# Altium PCB 混频器-拼板.PcbDoc
Units mil, origin at the board's own origin, x right, y up, seen from the top; angles counter-clockwise.
Board outline 6000 x 4000 mil, 2 copper layers (Top Layer, Bottom Layer); 30 components, 0 nets, 102 pads, 348 vias.
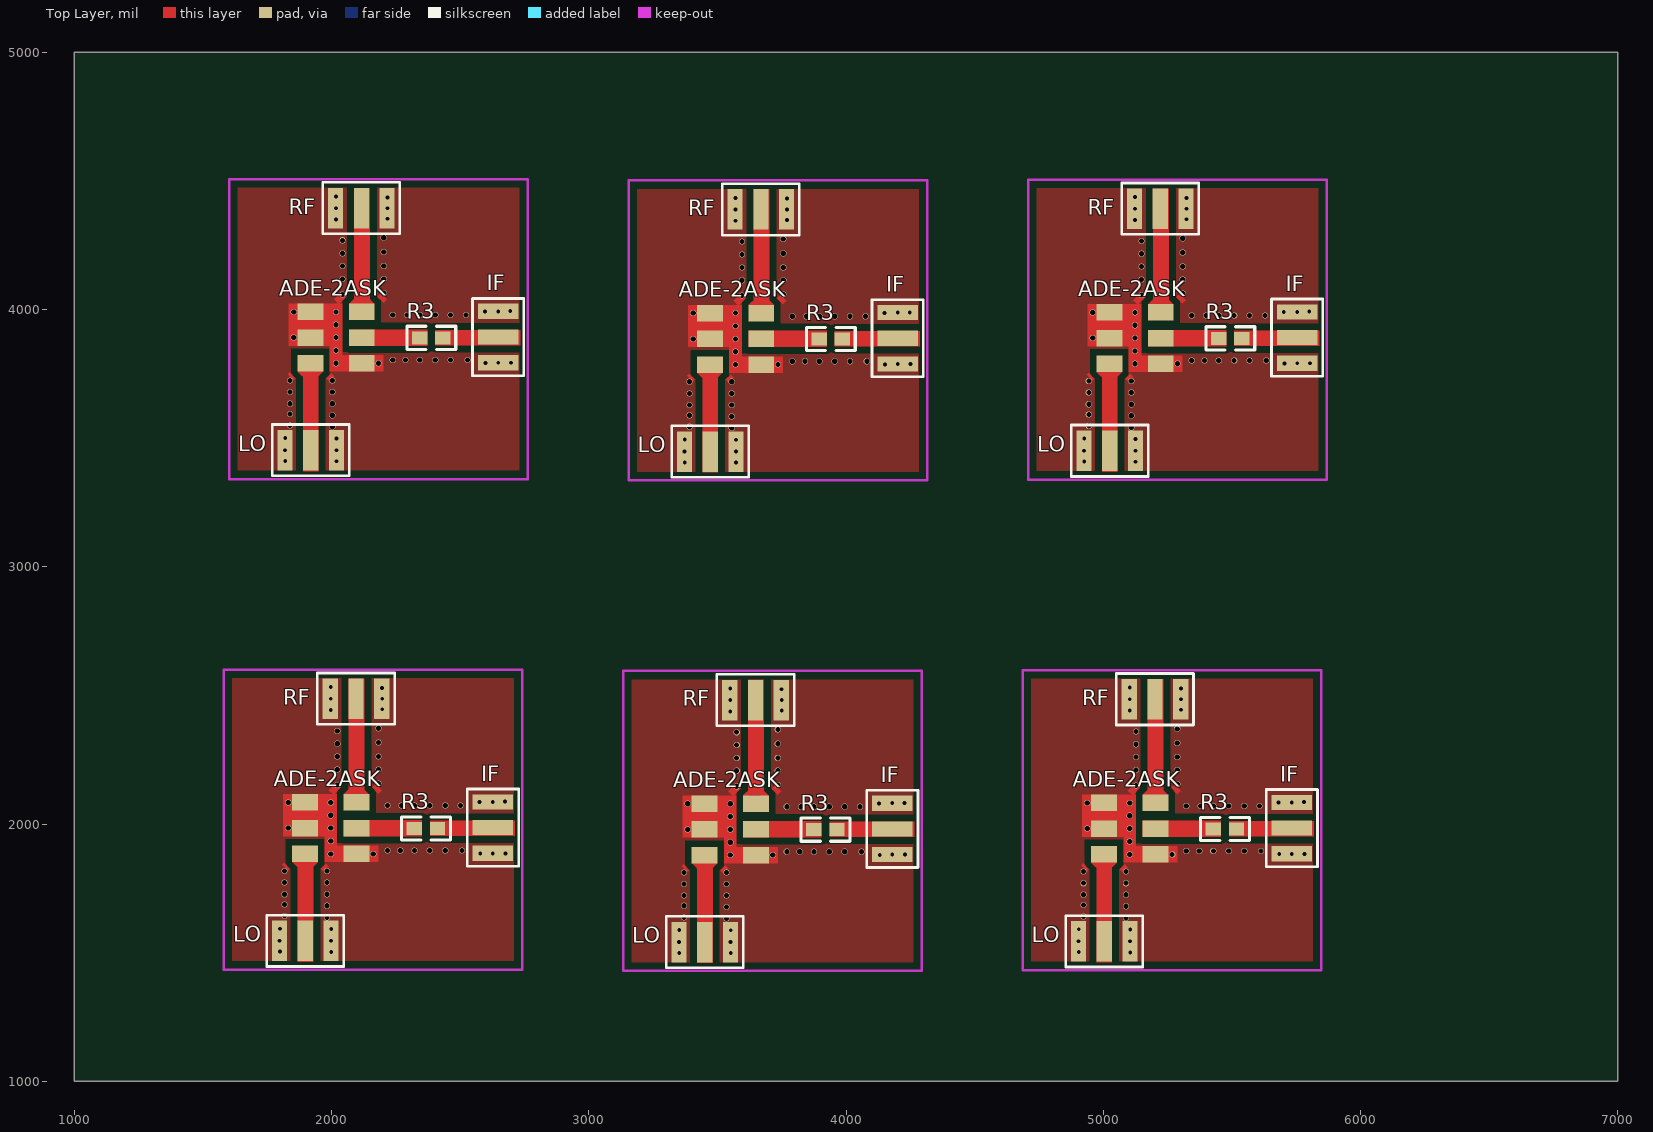
[diagram p0: Top Layer view]
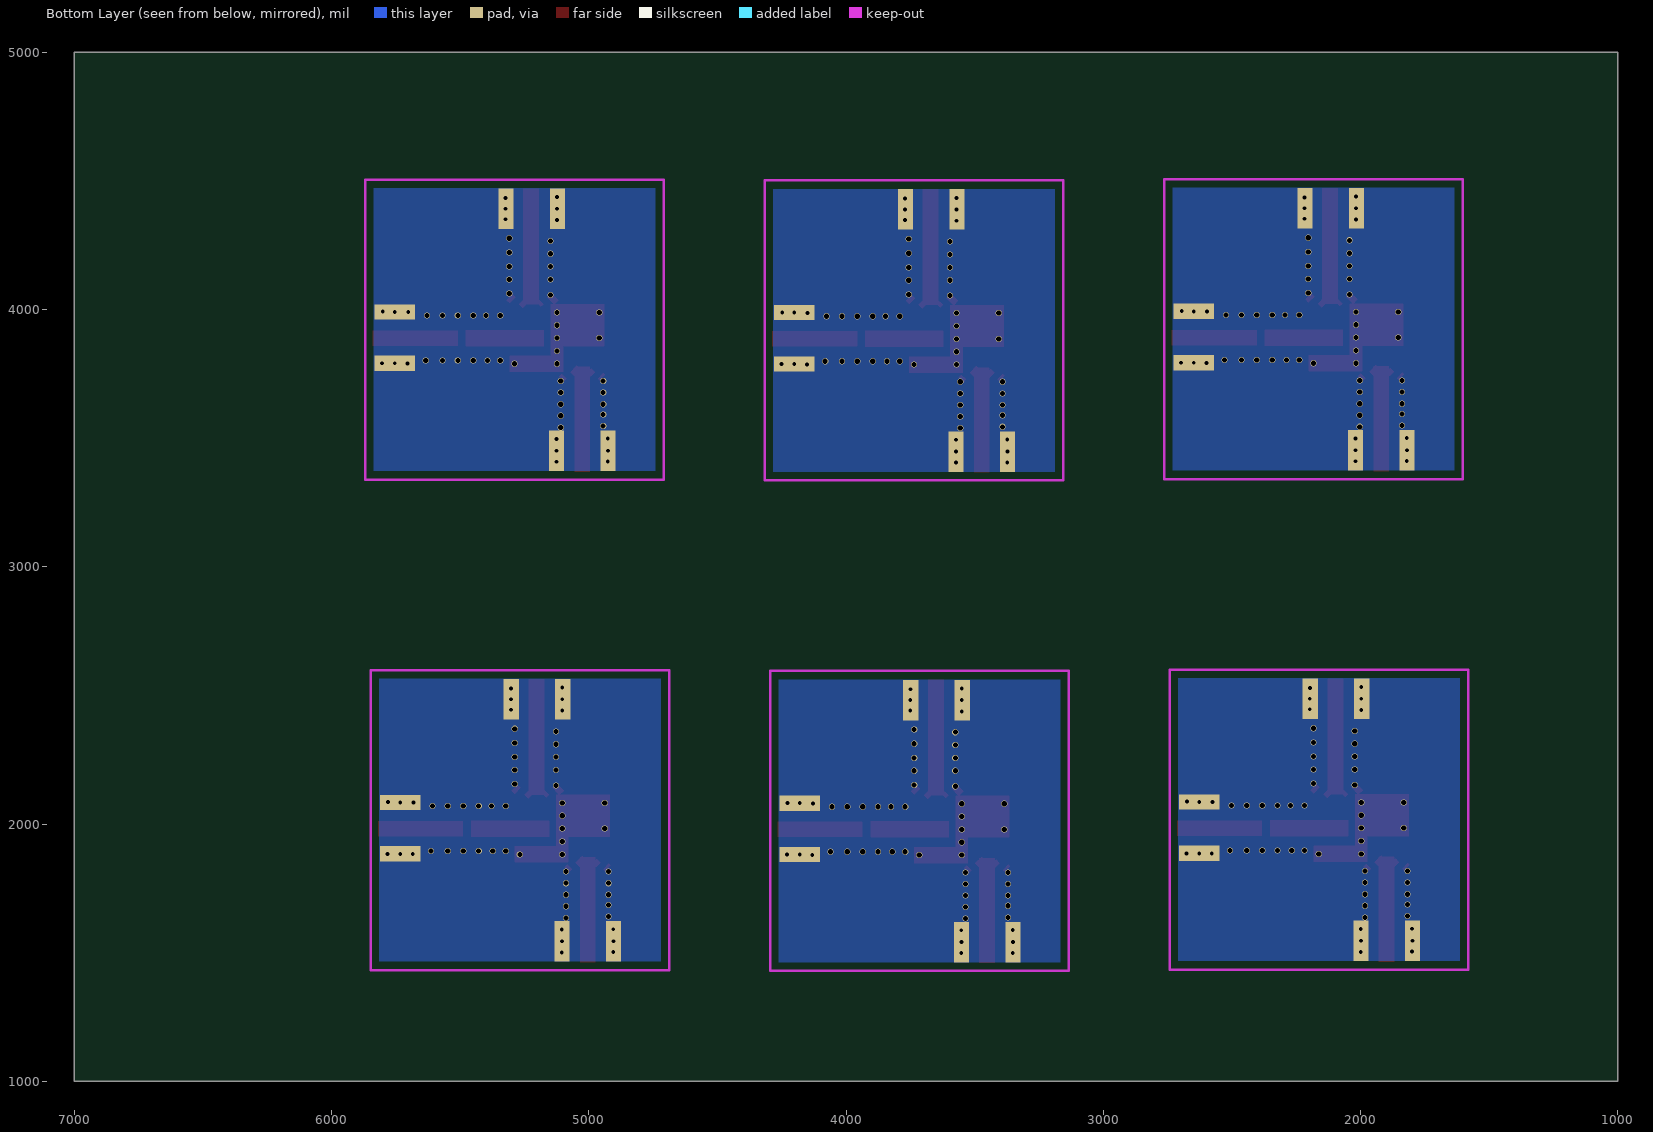
[diagram p1: Bottom Layer view, seen from below]

## Layer stack, top to bottom
Top Solder: solder mask 0.4, Solder Resist, Dk 3.5
Top Layer: signal copper 1.4
Dielectric 1: dielectric 12.6, FR-4, Dk 4.8
Bottom Layer: signal copper 1.4
Bottom Solder: solder mask 0.4, Solder Resist, Dk 3.5

## Board outline
1000,1000 7000,1000 7000,5000 1000,5000

## Design rules (kind name [scope] priority, off if disabled: settings)
Clearance [All] p1: gap=10
PolygonConnect [All] p1: connectstyle=Relief reliefconductorwidth=10 reliefentries=4 polygonreliefangle="90 Angle" airgapwidth=10
RoutingVias [All] p1: holewidth=28 width=50 viastyle="Through Hole" minholewidth=28 minwidth=50 maxholewidth=28 maxwidth=50
SolderMaskExpansion [All] p1: expansion=4
Width [All] p1: maxlimit=10 minlimit=10 preferedwidth=10
30 further rules are at their usual default settings.

## Components (designator, comment, footprint, x,y, rotation, side; value= is the part's Value field where it differs from the comment)
ADE-2ASK "4 HEADER" PL-052 5274,3757 r90 top
ADE-2ASK "4 HEADER" PL-052 5253,1850 r90 top
ADE-2ASK "4 HEADER" PL-052 3721,3754 r90 top
ADE-2ASK "4 HEADER" PL-052 3700,1847 r90 top
ADE-2ASK "4 HEADER" PL-052 2147,1852 r90 top
ADE-2ASK "4 HEADER" PL-052 2168,3759 r90 top
IF "SMA-2" SMA-2 5754,3891 r90 top
IF "SMA-2" SMA-2 5733,1984 r90 top
IF "SMA-2" SMA-2 4201,3888 r90 top
IF "SMA-2" SMA-2 4180,1981 r90 top
IF "SMA-2" SMA-2 2627,1986 r90 top
IF "SMA-2" SMA-2 2648,3893 r90 top
LO "SMA-2" SMA-2 5025,3451 r0 top
LO "SMA-2" SMA-2 5004,1544 r0 top
LO "SMA-2" SMA-2 3472,3448 r0 top
LO "SMA-2" SMA-2 3451,1541 r0 top
LO "SMA-2" SMA-2 1898,1546 r0 top
LO "SMA-2" SMA-2 1919,3453 r0 top
R3 "RES" 0805 5539,3888 r180 top
R3 "RES" 0805 5518,1981 r180 top
R3 "RES" 0805 3986,3885 r180 top
R3 "RES" 0805 3965,1978 r180 top
R3 "RES" 0805 2412,1983 r180 top
R3 "RES" 0805 2433,3890 r180 top
RF "SMA-2" SMA-2 5222,4392 r180 top
RF "SMA-2" SMA-2 5201,2485 r180 top
RF "SMA-2" SMA-2 3669,4389 r180 top
RF "SMA-2" SMA-2 3648,2482 r180 top
RF "SMA-2" SMA-2 2095,2487 r180 top
RF "SMA-2" SMA-2 2116,4394 r180 top

## Footprints (in the part's own frame and the unit in brackets; to place one, negate y for a bottom-side part, rotate by r counter-clockwise, add the part's x,y. Pads: shape width x height; smd on the part's side, far side on the other; paste and mask are expansions set on the pad)
0805 [mil]
  rect 60x50 smd: 1(0,0) 2(90,0)
  silkscreen extent -50,-45 140,45
PL-052 [mil]
  rect 64x100 smd: 1(32,50) 1(132,250) 1(232,250) 2(132,50) 3(232,50) 4(32,250)
  Top Layer region: 0,-35 64,-35 64,175 0,175
  Top Layer region: 0,125 264,125 264,175 0,175
  Top Layer region: 100,170 264,170 264,335 100,335
SMA-2 [mm]
  rect 1.5x4 smd: 1(0,0)
  rect 1.5x4 all layers, no hole: 2(2.54,0) 3(-2.54,0)
  silkscreen extent -3.81,-2.54 3.81,2.54, body extent -3,-11.89 3,1.71, height 3.2

## Part data
ADE-2ASK ADE-2ASK ADE-2ASK ADE-2ASK ADE-2ASK ADE-2ASK: "4 Pin Header"

## Via types
v1: diameter 24, hole 20, Top Layer to Bottom Layer, 240 vias
v2: diameter 30, hole 15, Top Layer to Bottom Layer, 108 vias

## Nets (pads, with @x,y where several pads share a name; then routed paths per layer and width w, separated by ;. In a path a pad name is that pad's centre, name@x,y a point inside that pad or via, vN(x,y) a via of type N, cw(c..) or ccw(c..) an arc to the next point about the centre after c; other vN are vias at no path point)
pads on no net: ADE-2ASK.1 ADE-2ASK.2 ADE-2ASK.3 ADE-2ASK.4 IF.1 IF.2 IF.3 LO.1 LO.2 LO.3 R3.1 R3.2 RF.1 RF.2 RF.3
copper on no net:
  other v1: 3535,1632 5088,1635 1982,1637 3370,1637 4923,1640 1817,1642 3535,1677 5088,1680 1982,1682 3370,1682 4923,1685 1817,1687 3370,1722 3535,1722 4923,1725 5088,1725 1817,1727 1982,1727 3370,1767 3535,1767 4923,1770 5088,1770 1817,1772 1982,1772 3370,1812 3535,1812 4923,1815 5088,1815 1817,1817 1982,1817 3550,1879 3715,1879 5103,1882 5268,1882 1997,1884 2162,1884 3770,1892 3820,1892 3875,1892 3935,1892 3995,1892 4060,1892 5323,1895 5373,1895 5428,1895 5488,1895 5548,1895 5613,1895 2217,1897 2267,1897 2322,1897 2382,1897 2442,1897 2507,1897 3550,1929 5103,1932 1997,1934 3385,1979 3550,1979 4938,1982 5103,1982 1832,1984 1997,1984 3550,2029 5103,2032 1997,2034 3770,2067 3825,2067 3875,2067 3935,2067 3995,2067 4055,2067 5323,2070 5378,2070 5428,2070 5488,2070 5548,2070 5608,2070 2217,2072 2272,2072 2322,2072 2382,2072 2442,2072 2502,2072 3385,2079 3550,2079 4938,2082 5103,2082 1832,2084 1997,2084 3575,2147 5128,2150 2022,2152 3735,2152 5288,2155 2182,2157 3575,2207 3735,2207 5128,2210 5288,2210 2022,2212 2182,2212 3575,2257 3735,2257 5128,2260 5288,2260 2022,2262 2182,2262 3575,2307 5128,2310 2022,2312 3735,2312 5288,2315 2182,2317 3575,2357 5128,2360 2022,2362 3735,2367 5288,2370 2182,2372 3556,3539 5109,3542 2003,3544 3391,3544 4944,3547 1838,3549 3556,3584 5109,3587 2003,3589 3391,3589 4944,3592 1838,3594 3391,3629 3556,3629 4944,3632 5109,3632 1838,3634 2003,3634 3391,3674 3556,3674 4944,3677 5109,3677 1838,3679 2003,3679 3391,3719 3556,3719 4944,3722 5109,3722 1838,3724 2003,3724 3571,3786 3736,3786 5124,3789 5289,3789 2018,3791 2183,3791 3791,3799 3841,3799 3896,3799 3956,3799 4016,3799 4081,3799 5344,3802 5394,3802 5449,3802 5509,3802 5569,3802 5634,3802 2238,3804 2288,3804 2343,3804 2403,3804 2463,3804 2528,3804 3571,3836 5124,3839 2018,3841 3406,3886 3571,3886 4959,3889 5124,3889 1853,3891 2018,3891 3571,3936 5124,3939 2018,3941 3791,3974 3846,3974 3896,3974 3956,3974 4016,3974 4076,3974 5344,3977 5399,3977 5449,3977 5509,3977 5569,3977 5629,3977 2238,3979 2293,3979 2343,3979 2403,3979 2463,3979 2523,3979 3406,3986 3571,3986 4959,3989 5124,3989 1853,3991 2018,3991 3596,4054 5149,4057 2043,4059 3756,4059 5309,4062 2203,4064 3596,4114 3756,4114 5149,4117 5309,4117 2043,4119 2203,4119 3596,4164 3756,4164 5149,4167 5309,4167 2043,4169 2203,4169 3596,4214 5149,4217 2043,4219 3756,4219 5309,4222 2203,4224 3596,4264 5149,4267 2043,4269 3756,4274 5309,4277 2203,4279
  other v2: 3552,1498 3352,1499 5105,1501 4905,1502 1999,1503 1799,1504 3351,1541 3551,1541 4904,1544 5104,1544 1798,1546 1998,1546 3552,1587 3352,1588 5105,1590 4905,1591 1999,1592 1799,1593 4131,1880 4180,1881 4230,1881 5684,1883 5733,1884 5783,1884 2578,1885 2627,1886 2677,1886 4128,2080 4180,2081 4227,2082 5681,2083 5733,2084 2575,2085 5780,2085 2627,2086 2674,2087 3550,2438 3750,2441 5103,2441 1997,2443 5303,2444 2197,2446 3550,2482 3750,2482 5103,2485 5303,2485 1997,2487 2197,2487 3749,2524 3550,2527 5302,2527 2196,2529 5103,2530 1997,2532 3573,3405 3373,3406 5126,3408 4926,3409 2020,3410 1820,3411 3372,3448 3572,3448 4925,3451 5125,3451 1819,3453 2019,3453 3573,3494 3373,3495 5126,3497 4926,3498 2020,3499 1820,3500 4152,3787 4201,3788 4251,3788 5705,3790 5754,3791 5804,3791 2599,3792 2648,3793 2698,3793 4149,3987 4201,3988 4248,3989 5702,3990 5754,3991 2596,3992 5801,3992 2648,3993 2695,3994 3571,4345 3771,4348 5124,4348 2018,4350 5324,4351 2218,4353 3571,4389 3771,4389 5124,4392 5324,4392 2018,4394 2218,4394 3770,4431 3571,4434 5323,4434 2217,4436 5124,4437 2018,4439

## Polygon pours and split planes (outlines as drawn)
no net on Top Layer "Top Layer-No Net" (solid, pour order 11): 4708,4505 5869,4505 5869,3339 4708,3339
no net on Top Layer "Top Layer-No Net" (solid, pour order 11): 4687,2598 5848,2598 5848,1432 4687,1432
no net on Top Layer "Top Layer-No Net" (solid, pour order 11): 3155,4502 4316,4502 4316,3336 3155,3336
no net on Top Layer "Top Layer-No Net" (solid, pour order 11): 3134,2595 4295,2595 4295,1429 3134,1429
no net on Top Layer "Top Layer-No Net" (solid, pour order 11): 1581,2600 2742,2600 2742,1434 1581,1434
no net on Top Layer "Top Layer-No Net" (solid, pour order 11): 1602,4507 2763,4507 2763,3341 1602,3341
no net on Bottom Layer "Top Layer-No Net" (solid, pour order 13): 4708,4505 5869,4505 5869,3339 4708,3339
no net on Bottom Layer "Top Layer-No Net" (solid, pour order 13): 4687,2598 5848,2598 5848,1432 4687,1432
no net on Bottom Layer "Top Layer-No Net" (solid, pour order 13): 3155,4502 4316,4502 4316,3336 3155,3336
no net on Bottom Layer "Top Layer-No Net" (solid, pour order 13): 3134,2595 4295,2595 4295,1429 3134,1429
no net on Bottom Layer "Top Layer-No Net" (solid, pour order 13): 1581,2600 2742,2600 2742,1434 1581,1434
no net on Bottom Layer "Top Layer-No Net" (solid, pour order 13): 1602,4507 2763,4507 2763,3341 1602,3341

## Keep-outs
Keep-Out Layer:
  lines w10: 1581,1434 1581,2600 2742,2600 2742,1434 1581,1434 ; 1602,3341 1602,4507 2763,4507 2763,3341 1602,3341 ; 3134,1429 4295,1429 4295,2595 3134,2595 3134,1429 ; 3155,3336 4316,3336 4316,4502 3155,4502 3155,3336 ; 4687,1432 5848,1432 5848,2598 4687,2598 4687,1432 ; 4708,3339 5869,3339 5869,4505 4708,4505 4708,3339

## Other copper
Top Layer:
  region: 5097.57,3717.57 5118,3738 5104.57,3751.43 5084.14,3731
  region: 4957.93,3722.07 4966.86,3731 4942.93,3754.93 4934,3746
  region: 5039,3722 5074,3757 5046,3785 5011,3750
  region: 5009.5,3721.5 5026,3738 4990.5,3773.5 4974,3757
  region: 5308.07,4022.07 5323,4037 5298.07,4061.93 5283.14,4047
  region: 5134.93,4017.07 5164.86,4047 5144.93,4066.93 5115,4037
  region: 5257,4004 5274,4021 5243,4052 5226,4035
  region: 5186.5,4008.5 5214,4036 5201.5,4048.5 5174,4021
  rectangle: 4995,3369 5056,3778
  rectangle: 5193,4020 5255,4471
  rectangle: 5174,3857 5479,3921
  rectangle: 5509,3859 5840,3919
  region: 5076.57,1810.57 5097,1831 5083.57,1844.43 5063.14,1824
  region: 4936.93,1815.07 4945.86,1824 4921.93,1847.93 4913,1839
  region: 5018,1815 5053,1850 5025,1878 4990,1843
  region: 4988.5,1814.5 5005,1831 4969.5,1866.5 4953,1850
  region: 5287.07,2115.07 5302,2130 5277.07,2154.93 5262.14,2140
  region: 5113.93,2110.07 5143.86,2140 5123.93,2159.93 5094,2130
  region: 5236,2097 5253,2114 5222,2145 5205,2128
  region: 5165.5,2101.5 5193,2129 5180.5,2141.5 5153,2114
  rectangle: 4974,1462 5035,1871
  rectangle: 5172,2113 5234,2564
  rectangle: 5153,1950 5458,2014
  rectangle: 5488,1952 5819,2012
  region: 3544.57,3714.57 3565,3735 3551.57,3748.43 3531.14,3728
  region: 3404.93,3719.07 3413.86,3728 3389.93,3751.93 3381,3743
  region: 3486,3719 3521,3754 3493,3782 3458,3747
  region: 3456.5,3718.5 3473,3735 3437.5,3770.5 3421,3754
  region: 3755.07,4019.07 3770,4034 3745.07,4058.93 3730.14,4044
  region: 3581.93,4014.07 3611.86,4044 3591.93,4063.93 3562,4034
  region: 3704,4001 3721,4018 3690,4049 3673,4032
  region: 3633.5,4005.5 3661,4033 3648.5,4045.5 3621,4018
  rectangle: 3442,3366 3503,3775
  rectangle: 3640,4017 3702,4468
  rectangle: 3621,3854 3926,3918
  rectangle: 3956,3856 4287,3916
  region: 3523.57,1807.57 3544,1828 3530.57,1841.43 3510.14,1821
  region: 3383.93,1812.07 3392.86,1821 3368.93,1844.93 3360,1836
  region: 3465,1812 3500,1847 3472,1875 3437,1840
  region: 3435.5,1811.5 3452,1828 3416.5,1863.5 3400,1847
  region: 3734.07,2112.07 3749,2127 3724.07,2151.93 3709.14,2137
  region: 3560.93,2107.07 3590.86,2137 3570.93,2156.93 3541,2127
  region: 3683,2094 3700,2111 3669,2142 3652,2125
  region: 3612.5,2098.5 3640,2126 3627.5,2138.5 3600,2111
  rectangle: 3421,1459 3482,1868
  rectangle: 3619,2110 3681,2561
  rectangle: 3600,1947 3905,2011
  rectangle: 3935,1949 4266,2009
  rectangle: 2382,1954 2713,2014
  rectangle: 2047,1952 2352,2016
  rectangle: 2066,2115 2128,2566
  rectangle: 1868,1464 1929,1873
  region: 2059.5,2103.5 2087,2131 2074.5,2143.5 2047,2116
  region: 2130,2099 2147,2116 2116,2147 2099,2130
  region: 2007.93,2112.07 2037.86,2142 2017.93,2161.93 1988,2132
  region: 2181.07,2117.07 2196,2132 2171.07,2156.93 2156.14,2142
  region: 1882.5,1816.5 1899,1833 1863.5,1868.5 1847,1852
  region: 1912,1817 1947,1852 1919,1880 1884,1845
  region: 1830.93,1817.07 1839.86,1826 1815.93,1849.93 1807,1841
  region: 1970.57,1812.57 1991,1833 1977.57,1846.43 1957.14,1826
  rectangle: 2403,3861 2734,3921
  rectangle: 2068,3859 2373,3923
  rectangle: 2087,4022 2149,4473
  rectangle: 1889,3371 1950,3780
  region: 2080.5,4010.5 2108,4038 2095.5,4050.5 2068,4023
  region: 2151,4006 2168,4023 2137,4054 2120,4037
  region: 2028.93,4019.07 2058.86,4049 2038.93,4068.93 2009,4039
  region: 2202.07,4024.07 2217,4039 2192.07,4063.93 2177.14,4049
  region: 1903.5,3723.5 1920,3740 1884.5,3775.5 1868,3759
  region: 1933,3724 1968,3759 1940,3787 1905,3752
  region: 1851.93,3724.07 1860.86,3733 1836.93,3756.93 1828,3748
  region: 1991.57,3719.57 2012,3740 1998.57,3753.43 1978.14,3733